# Altium PCB Strommessplatine.PcbDoc (part 2 of 2)
Units mm, origin at the board's own origin, x right, y up, seen from the top; angles counter-clockwise.
Board outline 160 x 100 mm, 4 copper layers (Top Layer, GND, VCC+, 2V5_OCM), stack 1.744 mm thick; 210 components, 62 nets, 482 pads, 189 vias.
Unrouted connection lines stored in the file: 1.
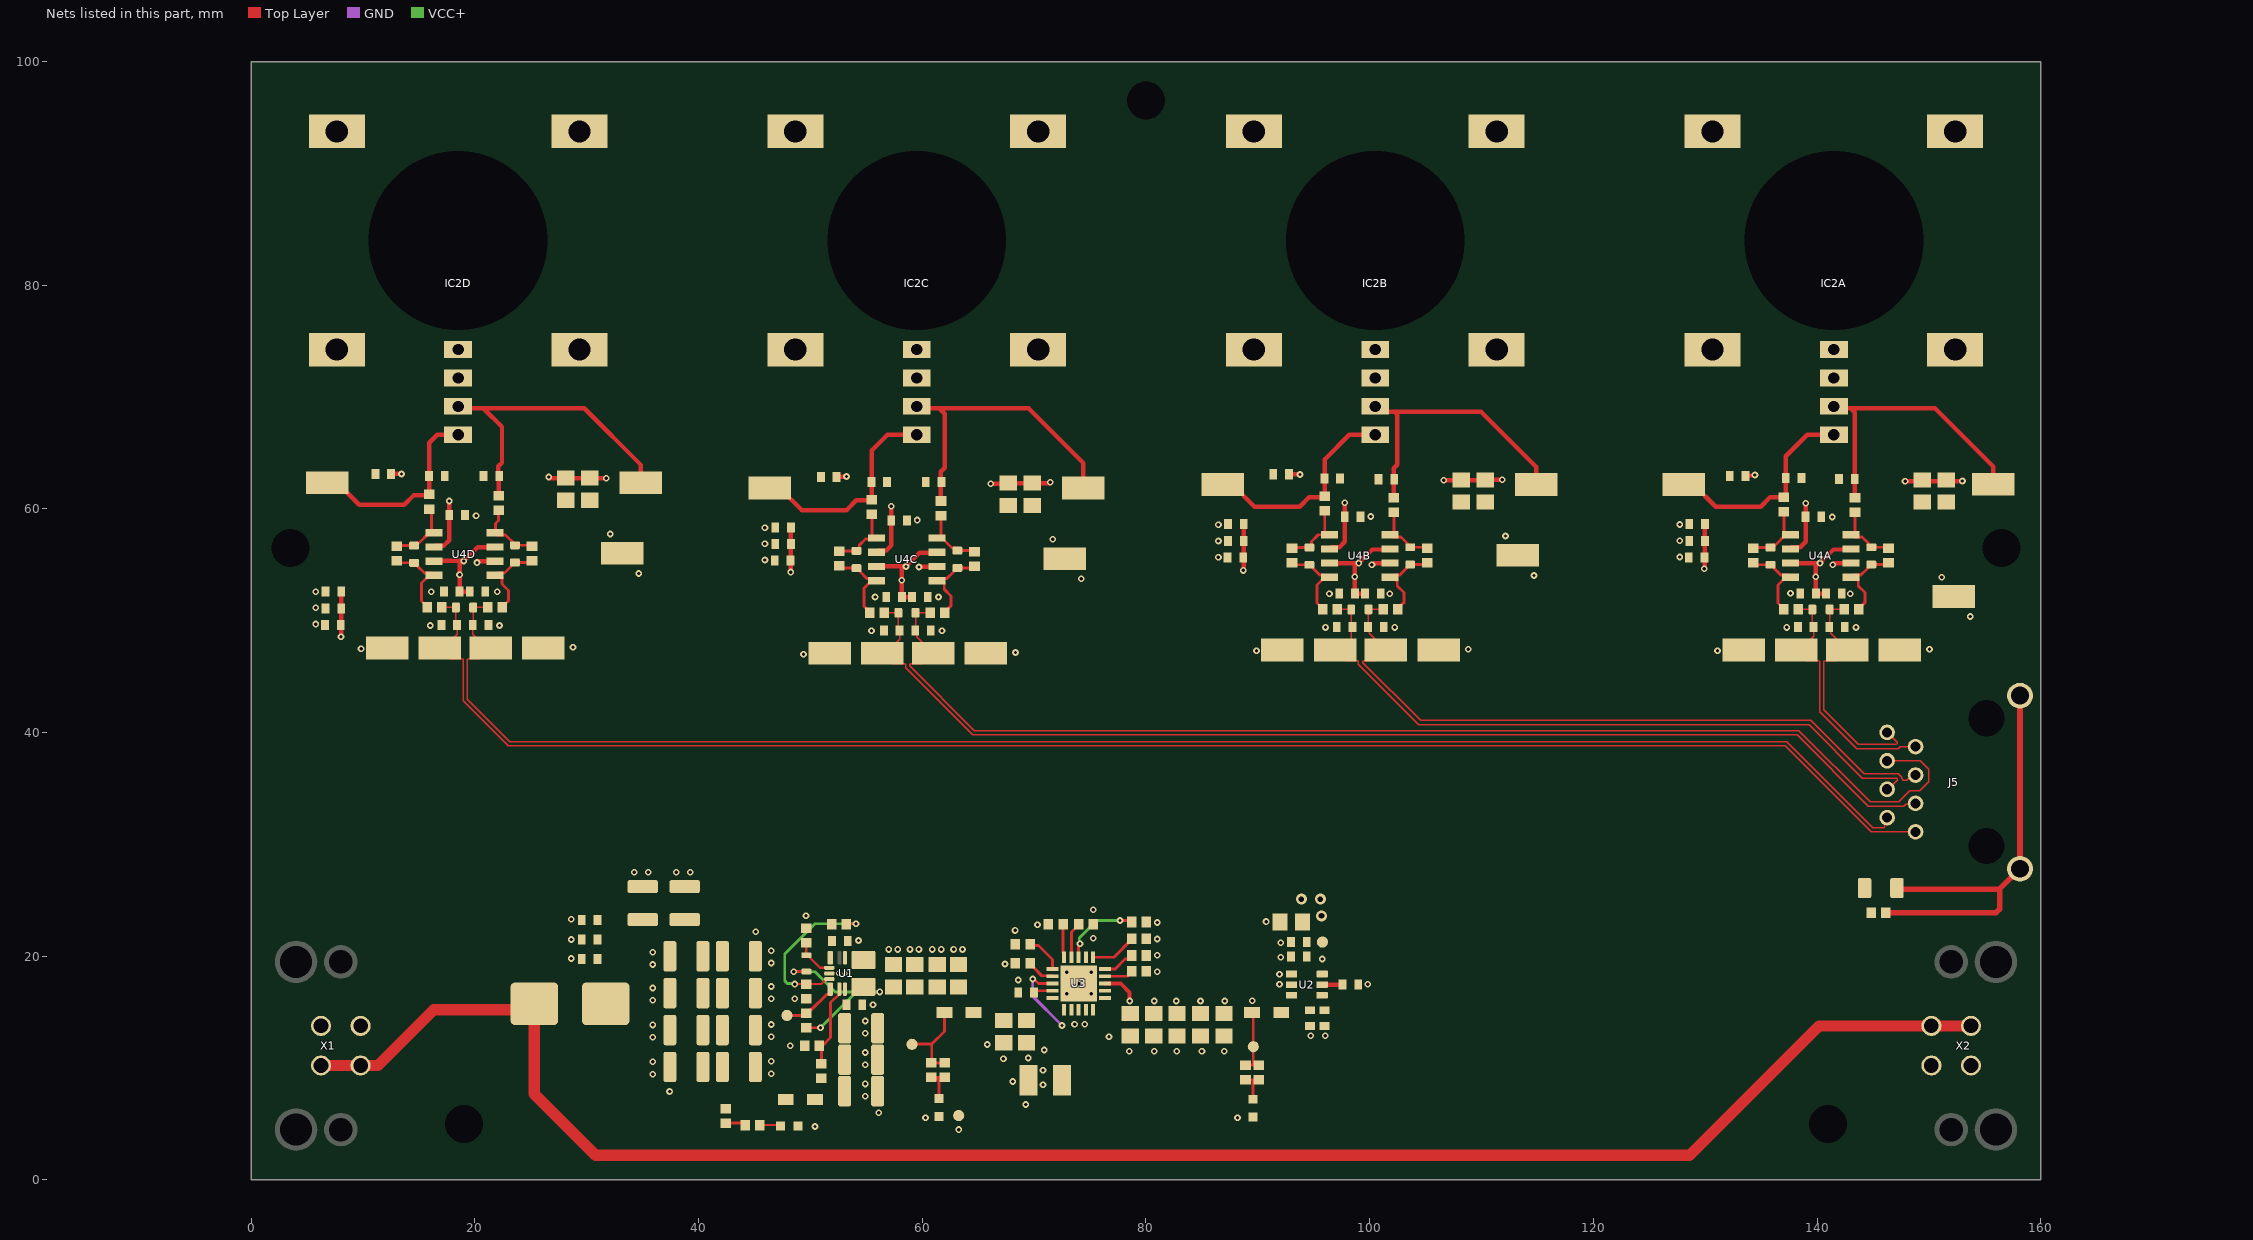
[diagram p4: the nets of this part, all layers, seen from the top]

## Part data (continued)
U1: library part TPSM365R6FRDNR, "3-V to 65-V input, 1-V to 13-V output, 0.6-A synchronous buck converter power module", Device Package=QFN-FCMOD, LCSC Part Number=C6723000, Manufacturer="Texas Instruments", Operating Temperature="-40 to +125 °C", Component Type="Power module with inductor", ComponentLink1Description=Datasheet, ComponentLink1URL=https://www.ti.com/lit/ds/symlink/tpsm365r3.pdf?ts=1747982141267, Created from=KIlhan, Created On="16/06/2025 17:12:20", Last Updated="16/06/2025 17:12:20", Live Cycle Status=1, Manufacturer Part Number=TPSM365R6FRDNR, Mounting Type=SMD, PartID=42, Series=TPSM365, Stock number="not stored", Supplier 1=LCSC, Supplier 2=Mouser, Supplier Part Number 1=C6723000, Supplier Part Number 2=595-TPSM365R6FRDNR, Type="Power module (integrated inductor)"
U2: "2.5V ±0.05% 2.75V~6V 10mA Fixed SOT-23-6 Voltage Reference ROHS", Device Package=SMD, LCSC Part Number=C6265005, Manufacturer="Texas Instruments", Operating Temperature=-40℃~+125℃, Supplier Part Number 1=595-REF35250QDBVR, Component Type="Voltage Reference", ComponentLink1Description=Datasheet, ComponentLink1URL=https://wmsc.lcsc.com/wmsc/upload/file/pdf/v2/lcsc/2311301509_Texas-Instruments-REF35250QDBVR_C6265005.pdf, Created from=KIlhan, Created On="20/03/2025 09:42:36", Last Updated="23/03/2025 21:09:34", Live Cycle Status=1, Manufacturer Part Number=REF35250QDBVR, Mounting Type=SMD, PartID=18, Stock number="not stored", Supplier 1=Mouser, Supplier 2=LCSC, Supplier Part Number 2=C6265005, Type="Voltage Reference"
U3: library part TPS7A4700RGWR, "1-A, 36-V, low-noise, high-PSRR, low-dropout voltage regulator with enable", Device Package=VQFN-20-EP(5x5), LCSC Part Number=C114839, Manufacturer="Texas Instruments", Mouser Part Number=595-TPS7A4701RGWR, Operating Temperature="-40 to +125 °C", Supplier Part Number 1=595-TPS7A4700RGWR, Arrow Part Number=TPS7A4701RGWR, Arrow Price/Stock=https://www.arrow.com/en/products/tps7a4701rgwr/texas-instruments?utm_currency=USD&region=nac, Component Type=LDO, ComponentLink1Description=Datasheet, ComponentLink1URL=https://www.ti.com/lit/ds/symlink/tps7a47.pdf?ts=1750053970117&ref_url=https%253A%252F%252Fwww.ti.com%252Fproduct%252FTPS7A47%253FkeyMatch%253DTPS7A4701RGWR%2526tisearch%253Duniversal_search%2526usecase%253DOPN-ALT, Created from=KIlhan, Created On="16/06/2025 23:37:46", Datasheet Link=http://www.ti.com/lit/gpn/tps7a47, Geometry.Height=1mm, Last Updated="18/06/2025 15:16:15", Live Cycle Status=1, Manufacturer Part Number=TPS7A4700RGWR, Manufacturer_Name="Texas Instruments", Manufacturer_Part_Number=TPS7A4701RGWR, Mounting Type=SMD, Mouser Price/Stock=https://www.mouser.co.uk/ProductDetail/Texas-Instruments/TPS7A4701RGWR?qs=2YfbMANv382WBl7zEiZ0Og%3D%3D, PartID=20, Series=TPS7A47, Stock number="not stored", Supplier 1=Mouser, Supplier 2=LCSC, Supplier Part Number 2=C114839, Type=LDO
U4A U4B U4C U4D: library part THS4521IDR, "THS452x Very Low Power, Negative Rail Input, Rail-To-Rail Output, Fully Differential Amplifier", Device Package=SOIC-8, LCSC Part Number=C16092, Manufacturer="Texas Instruments", Operating Temperature="-40 to +85 °C", Channels=1, Component Type="Differential Amplifier", ComponentLink1Description=Datasheet, ComponentLink1URL=https://www.ti.com/cn/lit/ds/symlink/ths4521.pdf?ts=1662191143470, Created from=AGeiger, Created On="03/09/2022 09:19:34", GBP="145 MHz", Last Updated="30/09/2024 15:54:43", Live Cycle Status=1, Manufacturer Part Number=THS4521IDR, Mounting Type=SMD, PartID=15, Series=THS4521, Supplier 1=LCSC, Supplier Part Number 1=C16092, Type="Differential Amplifiers"
VOUTA VOUTB VOUTC VOUTD: "Circuit Board Hardware - PCB SM TEST POINT ON T&R - MINIATURE", Device Package=SMD, LCSC Part Number=C5199800, Manufacturer="Keystone Electronics", Supplier Part Number 1=534-5019, Component Type="Circuit Board Hardware", ComponentLink1Description=Datasheet, ComponentLink1URL=https://www.mouser.de/datasheet/2/215/019-743690.pdf, ComponentLink2Description=Datasheet, ComponentLink2URL=http://www.keyelco.com/product-pdf.cfm?p=1357, Created from=AGeiger, Created On="03/06/2023 11:34:10", Last Updated="03/06/2023 11:43:17", Live Cycle Status=1, Manufacturer Part Number=5019, Mounting Type=SMD, PartID=27, Supplier 1=Mouser, Type="PCB SMD Testpoint"
X1 X2: "M12 Metric Circular Connector, A-Coded, Metal Non-shielded, 4A, 04 pins, Male Connector, Male Contact, Hexagonal, M12*1.0, Screw Thread, PCB 90°", Device Package=THT, LCSC Part Number=C19108992, Manufacturer=CAZN, Operating Temperature="-25℃ - 80 ℃", Component Type="M12 A-Type 4 Pole Connector", ComponentLink1Description=Datasheet, ComponentLink1URL=https://www.lcsc.com/datasheet/C19108992.pdf?spm=wm.sxq.inf.ggs___wm.fly.bg.0.xh&lcsc_vid=TwNaAlRSR1ldAVwCFFVbXlUCQQUIVQcDFgRYX1YFEwcxVlNeR1VZUFBQQ1RbXzsOAxUeFF5JWBYZEEoKFBINSQcJGk4eFQsCAgIaSgADAwAHC0slRVNfUVBSTlZADxALGw%3D%3D, Created from=TGaupp, Created On="03/06/2026 11:54:12", Last Updated="03/06/2026 13:55:49", Live Cycle Status=1, Manufacturer Part Number=CAZN_M12-P4A-GPL_M12, Mounting Type=THT, PartID=31, Stock number="not stored", Supplier 1=LCSC, Supplier Part Number 1=C19108992, Type="M12 Connector"

## Via types
v1: diameter 0.6, hole 0.3, Top Layer to 2V5_OCM, 104 vias
v2: diameter 0.6, hole 0.3, Top Layer to 2V5_OCM, tented both sides, 80 vias
v3: diameter 1, hole 0.5, Top Layer to 2V5_OCM, tented both sides, 3 vias
v4: diameter 0.45, hole 0.3, Top Layer to 2V5_OCM, 2 vias

## Nets (pads, with @x,y where several pads share a name; then routed paths per layer and width w, separated by ;. In a path a pad name is that pad's centre, name@x,y a point inside that pad or via, vN(x,y) a via of type N, cw(c..) or ccw(c..) an arc to the next point about the centre after c; other vN are vias at no path point)
2V5_OCM: 2V5.1 C11.2 C17A.1 C17B.1 C17C.1 C17D.1 C31.2 C32.2 U2.6 U4A.2 U4B.2 U4C.2 U4D.2 | length 20.4
  Top Layer w0.4: U4D.2@16.347,56.599 16.472,56.724 17.224,56.724 17.709,57.209 C17D.1@17.709,59.459 ; C17D.1@17.7,59.45 v2(17.7,60.7) ; U4C.2@55.872,56.124 55.997,56.249 56.749,56.249 57.234,56.734 C17C.1@57.234,58.984 ; C17C.1@57.225,58.975 v2(57.225,60.225) ; U4B.2@96.422,56.449 96.547,56.574 97.299,56.574 97.784,57.059 C17B.1@97.784,59.309 ; C17B.1@97.775,59.3 v2(97.775,60.55) ; U4A.2@137.622,56.449 137.747,56.574 138.499,56.574 138.984,57.059 C17A.1@138.984,59.309 ; C17A.1@138.975,59.3 138.987,59.313 138.987,60.488 v2(139,60.5)
  other v2: 95.75,19.75
  other v3: 95.694,23.611 93.894,25.111 95.594,25.111
+6.5V: +6.5V.1 C6.2 C7.2 C39.2 C40.2 L13.1 R5.2 R10.1 R17.1 R38.2 U1.4 | length 23.3
  Top Layer w0.254: v1(48.494,18.611) 48.506,18.622 49.618,18.622 R5.2@49.629,18.634 ; R38.2@49.629,13.614 49.632,13.611 v1(50.894,13.611) ; +6.5V.1@59.075,12.125 59.09,12.14 60.84,12.14 ; R17.1@60.794,10.461 R17.1@60.84,10.461 ; L13.1@61.979,14.964 61.979,13.279 60.84,12.14 ; R10.1@61.994,10.461 R17.1@60.84,10.461 ; R17.1@60.84,10.461 60.84,12.14
  VCC+ w0.254: v1(48.494,18.611) 50.416,18.611 52.216,16.811 54.094,16.811 ; v1(50.894,13.611) 54.094,16.811 ; v1(56.194,16.811) 54.094,16.811
GND: C1.2 C2.2 C3.2 C4.2 C5.1 C6.1 C7.1 C8.1 C9.1 C10.1 C11.1 C12.1 C13.1 C14.2 C15.1 C16A.1 C16B.1 C16C.1 C16D.1 C17A.2 C17B.2 C17C.2 C17D.2 C19.1 C20A.2 C20B.2 C20C.2 C20D.2 C22A.1 C22B.1 C22C.1 C22D.1 C23A.1 C23B.1 C23C.1 C23D.1 C24A.1 C24B.1 C24C.1 C24D.1 C25A.1 C25B.1 C25C.1 C25D.1 C26.1 C28A.1 C28B.1 C28C.1 C28D.1 C29A.1 C29B.1 C29C.1 C29D.1 C30.2 C31.1 C32.1 C33.1 C34.2 C35.1 C36.1 C37A.1 C37B.1 C37C.1 C37D.1 C38A.1 C38B.1 C38C.1 C38D.1 C39.1 C40.1 C41.2 C42.2 C43.2 C44A.1 C44B.1 C44C.1 C44D.1 C45.2 C46.2 C47.2 C48.2 C49.2 C50.2 C51.2 C52.2 C53A.1 C53B.1 C53C.1 C53D.1 C54.2 D2.1 D3.1 D4.1 GND.1 IC2A.3 IC2A.E1 IC2A.E2 IC2A.E3 IC2A.E4 IC2B.3 IC2B.E1 IC2B.E2 IC2B.E3 IC2B.E4 IC2C.3 IC2C.E1 IC2C.E2 IC2C.E3 IC2C.E4 IC2D.3 IC2D.E1 IC2D.E2 IC2D.E3 IC2D.E4 R2.2 R4.1 R6.2 R19.2 R30.2 R31.1 R32.1 R33.1 R34.1 R35.2 R36.1 R37.1 TP1A.1 TP1B.1 TP1C.1 TP1D.1 TP2A.1 TP2B.1 TP2C.1 TP2D.1 TP3A.1 TP3B.1 TP3C.1 TP3D.1 U1.10 U2.1 U2.2 U3.2 U3.7 U3.17 U3.18 U3.19 U3.21 U4A.6 U4B.6 U4C.6 U4D.6 X1.2 X1.3 X2.2 X2.3 | length 7
  Top Layer w0.4: v1(20.175,55.201) 20.229,55.201 20.343,55.315 U4D.6@22.016,55.315 ; v1(59.7,54.8) 59.727,54.827 61.304,54.827 U4C.6@61.331,54.854 ; v1(100.2,55) 100.254,55 100.408,55.154 U4B.6@101.829,55.154 ; v1(141.4,55) 141.454,55 141.608,55.154 U4A.6@143.058,55.154
  other v1: 63.25,4.5 50.4,4.775 60.285,5.57 88.185,5.57 56.094,6.011 54.894,7.486 37.4,7.9 54.894,8.586 35.908,9.461 46.5,9.5 54.894,10.299 35.908,10.561 46.5,10.6 67.25,10.825 54.894,11.399 78.5,11.5 80.75,11.5 82.75,11.5 85,11.5 87,11.5 48.2,12 65.794,12.111 35.908,12.761 46.5,12.8 76.694,12.811 54.894,13.111 35.908,13.861 46.5,13.9 73.616,13.911 74.516,13.911 54.894,14.211 55.585,15.67 35.908,16.061 46.5,16.2 48.594,16.211 72.912,16.633 75.112,16.633 35.908,17.161 46.5,17.3 73.991,17.556 68.585,17.87 72.912,18.583 75.112,18.583 80.994,18.611 35.908,19.261 67.394,19.311 46.5,19.4 80.994,20.078 35.908,20.361 46.5,20.5 56.994,20.611 57.794,20.611 58.894,20.611 59.694,20.611 60.894,20.611 61.694,20.611 62.794,20.611 63.594,20.611 54.294,21.411 80.994,21.544 75.294,21.611 45.1,22.2 68.294,22.311 70.294,22.811 80.994,23.011 49.594,23.611 75.285,24.17 34.25,27.5 35.5,27.5 38,27.5 39.25,27.5
  other v2: 69.25,6.75 70.794,8.511 68.075,8.8 70.794,9.811 69.475,10.9 70.895,11.611 94.737,12.9 96.037,12.9 91.937,17.5 99.837,17.5 91.937,18.4 28.6,19.8 92.037,19.9 92.037,21.2 28.6,21.5 90.737,23.1 28.6,23.3 49.377,47.011 68.325,47.16 89.875,47.311 131.104,47.311 108.823,47.46 150.052,47.46 9.817,47.486 28.765,47.635 55.45,49.1 61.756,49.104 96.054,49.404 102.254,49.404 137.283,49.404 143.483,49.404 15.996,49.579 22.196,49.579 5.775,49.7 153.7,50.375 5.775,51.15 55.775,52.125 61.45,52.125 96.4,52.425 101.8,52.425 142.971,52.411 137.635,52.456 5.775,52.6 16.1,52.6 22,52.6 74.202,53.75 151.15,53.9 114.7,54.05 34.642,54.225 45.925,55.425 86.475,55.675 127.725,55.7 45.925,56.875 86.475,57.125 127.725,57.15 71.652,57.275 112.15,57.575 32.092,57.75 45.925,58.325 86.475,58.575 127.725,58.6 59.55,59 141.35,59.275 100.1,59.325 20.1,59.4
  other v4: 52.516,18.464 53.089,18.464
I1_OUT_N: C16A.2 C18A.1 J5.A8 OUT_NA.1 R13A.2 | length 21.7
  Top Layer w0.127: C18A.1@141.124,51.011 R13A.2@142.423,51.011 ; C18A.1@141.127,51.008 141.127,49.465 C16A.2@141.087,49.425 141.212,49.299 141.212,48.859 OUT_NA.1@142.686,47.385 141.734,46.434 140.68,46.434 140.605,46.359 140.605,42.033 143.7,38.939 147.09,38.939 147.164,39.013 147.164,39.118 J5.A8@146.268,40.015
I1_OUT_P: C18A.2 C20A.1 J5.A7 OUT_PA.1 R15A.2 | length 22.4
  Top Layer w0.127: OUT_PA.1@138.144,47.385 139.095,46.434 140.15,46.434 140.224,46.359 140.224,41.876 143.542,38.558 147.248,38.558 147.435,38.745 J5.A7@148.808,38.745 ; R15A.2@138.351,51.011 C18A.2@139.584,51.011 139.584,49.528 C20A.1@139.687,49.425 139.687,48.623 OUT_PA.1@138.449,47.385
I2_OUT_N: C16B.2 C18B.1 J5.A5 OUT_NB.1 R13B.2 | length 62.2
  Top Layer w0.127: C16B.2@99.858,49.425 99.984,49.299 99.984,48.859 OUT_NB.1@101.457,47.385 100.506,46.434 99.451,46.434 99.377,46.359 99.377,46.254 104.55,41.081 139.458,41.081 144.223,36.316 147.279,36.316 147.577,36.018 147.577,35.904 147.726,35.755 148.013,35.755 148.463,36.205 J5.A5@148.808,36.205 ; C16B.2@99.895,49.462 C18B.1@99.895,51.011 R13B.2@101.194,51.011
I2_OUT_P: C18B.2 C20B.1 J5.A4 OUT_PB.1 R15B.2 | length 62
  Top Layer w0.127: OUT_PB.1@96.915,47.385 97.867,46.434 98.921,46.434 98.996,46.359 98.996,46.096 104.392,40.7 139.3,40.7 144.065,35.935 147.121,35.935 147.196,35.861 147.196,35.755 146.375,34.935 J5.A4@146.268,34.935 ; R15B.2@97.122,51.011 C18B.2@98.355,51.011 98.355,48.52 98.351,48.516 98.351,48.337 97.4,47.385 OUT_PB.1@97.22,47.385
I3_OUT_N: C16C.2 C18C.1 J5.A6 OUT_NC.1 R13C.2 | length 110.2
  Top Layer w0.127: C16C.2@59.36,49.125 59.486,48.999 59.486,48.559 OUT_NC.1@60.959,47.085 60.008,46.134 58.953,46.134 58.879,46.059 58.879,45.954 64.652,40.181 138.377,40.181 144.758,33.8 147.3,33.8 148.303,34.803 149.203,34.803 150,35.6 150,36.7 149.225,37.475 J5.A6@146.268,37.475 ; C16C.2@59.397,49.162 C18C.1@59.397,50.711 R13C.2@60.696,50.711
I3_OUT_P: C18C.2 C20C.1 J5.A3 OUT_PC.1 R15C.2 | length 103.7
  Top Layer w0.127: OUT_PC.1@56.417,47.085 57.369,46.134 58.423,46.134 58.498,46.059 58.498,45.796 64.494,39.8 138.219,39.8 144.6,33.419 147.759,33.419 147.917,33.577 148.72,33.577 J5.A3@148.808,33.665 ; R15C.2@56.624,50.711 C18C.2@57.857,50.711 57.857,49.228 C20C.1@57.96,49.125 57.96,48.323 OUT_PC.1@56.722,47.085
I4_OUT_N: C16D.2 C18D.1 J5.A2 OUT_ND.1 R13D.2 | length 144.3
  Top Layer w0.127: R13D.2@21.15,51.2 21.136,51.186 C18D.1@19.837,51.186 19.837,49.637 C16D.2@19.8,49.6 19.8,48.798 21.038,47.56 OUT_ND.1@21.399,47.56 20.448,46.609 19.393,46.609 19.319,46.534 19.319,44.995 19.319,43 23.119,39.2 137.3,39.2 144.994,31.506 146.002,31.506 146.077,31.58 146.077,32.204 J5.A2@146.268,32.395
I4_OUT_P: C18D.2 C20D.1 J5.A1 OUT_PD.1 R15D.2 | length 146.7
  Top Layer w0.127: R15D.2@17.05,51.2 17.064,51.186 C18D.2@18.297,51.186 18.297,49.703 C20D.1@18.4,49.6 18.4,48.798 17.162,47.56 OUT_PD.1@16.857,47.56 17.809,46.609 18.863,46.609 18.938,46.534 18.938,44.837 18.938,42.842 22.961,38.819 137.142,38.819 144.836,31.125 J5.A1@148.808,31.125
NetC1_1: C1.1 R3.2 U1.8
NetC2_1: C2.1 C3.1 C4.1 C5.2 L1.2 R1.2 U1.3
NetC12_2: C12.2 U2.5 | length 1.9
  Top Layer w0.4: U2.5@95.689,17.464 C12.2@97.579,17.464
NetC13_2: C13.2 C33.2 L3.2 U2.3 U2.4
NetC21A_2: C21A.2 R11A.1 R12A.2 U4A.8 | length 5.9
  Top Layer w0.254: U4A.8@143.058,57.694 U4A.8@143.198,57.694 ; R12A.2@143.396,59.706 143.396,57.892 U4A.8@143.198,57.694 ; C21A.2@144.862,56.57 R11A.1@146.292,56.57 ; C21A.2@144.889,56.627 144.719,56.627 144.549,56.798 144.549,56.968 144.02,57.496 143.396,57.496 U4A.8@143.198,57.694
NetC21B_2: C21B.2 R11B.1 R12B.2 U4B.8 | length 5.7
  Top Layer w0.254: U4B.8@101.829,57.694 101.969,57.694 102.167,57.892 R12B.2@102.167,59.706 ; U4B.8@102.027,57.496 102.792,57.496 C21B.2@103.66,56.628 ; C21B.2@103.633,56.57 R11B.1@105.063,56.57
NetC21C_2: C21C.2 R11C.1 R12C.2 U4C.8 | length 5.9
  Top Layer w0.254: U4C.8@61.331,57.394 U4C.8@61.424,57.394 ; R12C.2@61.669,59.406 61.669,57.639 U4C.8@61.424,57.394 ; R11C.1@64.66,56.175 64.565,56.27 C21C.2@63.135,56.27 62.907,56.498 62.665,56.498 61.768,57.394 U4C.8@61.424,57.394
NetC21D_2: C21D.2 R11D.1 R12D.2 U4D.8 | length 6.1
  Top Layer w0.254: R12D.2@22.109,59.881 22.109,58.965 21.829,58.686 21.829,57.928 U4D.8@21.771,57.869 21.969,57.671 22.734,57.671 C21D.2@23.602,56.803 ; C21D.2@23.49,56.745 C21D.2@23.575,56.745 25.005,56.745 R11D.1@25.1,56.65
NetC27A_2: C27A.2 R14A.2 R16A.1 U4A.1 | length 5.9
  Top Layer w0.254: R16A.1@134.332,56.545 C27A.2@135.837,56.545 136.065,56.773 136.275,56.773 137.196,57.694 U4A.1@137.239,57.694 ; R14A.2@137.041,59.75 137.041,57.892 U4A.1@137.239,57.694 ; U4A.1@137.634,57.694 U4A.1@137.239,57.694
NetC27B_2: C27B.2 R14B.2 R16B.1 U4B.1 | length 6.2
  Top Layer w0.254: R16B.1@93.103,56.545 C27B.2@94.608,56.545 94.811,56.748 94.811,57.099 95.407,57.694 U4B.1@96.182,57.694 ; R14B.2@95.984,59.815 95.984,57.892 U4B.1@96.182,57.694 ; U4B.1@96.405,57.694 U4B.1@96.182,57.694
NetC27C_2: C27C.2 R14C.2 R16C.1 U4C.1 | length 6.2
  Top Layer w0.254: R16C.1@52.605,56.245 54.128,56.245 54.356,56.473 54.356,56.756 54.912,57.312 55.649,57.312 U4C.1@55.731,57.394 ; R14C.2@55.486,59.515 55.486,57.639 U4C.1@55.731,57.394 ; U4C.1@55.907,57.394 U4C.1@55.731,57.394
NetC27D_2: C27D.2 R14D.2 R16D.1 U4D.1 | length 6
  Top Layer w0.254: R16D.1@13,56.675 13.045,56.72 C27D.2@14.55,56.72 14.778,56.948 14.988,56.948 15.909,57.869 U4D.1@16.124,57.869 ; R14D.2@15.926,59.99 16.124,59.792 U4D.1@16.124,57.869 ; U4D.1@16.347,57.869 U4D.1@16.124,57.869
NetC30_1: C30.1 U3.14 | length 1.7
  Top Layer w0.254: C30.1@69.979,16.764 70.129,16.914 U3.14@71.629,16.914
NetC54_1: C54.1 J5.S1 J5.S2 R19.1 | length 39.3
  Top Layer w0.5: R19.1@146.15,23.9 156,23.9 156.325,24.225 156.325,26 ; C54.1@147.15,26 156.325,26 ; J5.S2@158.15,43.3 J5.S1@158.15,27.825 156.325,26
NetD2_2: D2.2 R18.2 | length 1.9
  Top Layer w0.16: R18.2@45.45,4.9 47.125,4.9 D2.2@47.3,4.725
NetD3_2: D3.2 R8.2 R9.2 | length 2.9
  Top Layer w0.254: R9.2@88.894,8.961 R8.2@90.094,8.961 ; D3.2@89.564,7.211 89.564,8.936
NetD4_2: D4.2 R10.2 R17.2 | length 3.4
  Top Layer w0.254: R17.2@60.794,9.161 R10.2@61.994,9.161 ; 61.332,8.989 61.489,8.831 ; 61.394,9.161 61.394,8.926 61.489,8.831 ; D4.2@61.489,7.264 61.489,8.831
NetR1_1: R1.1 R2.1 U1.2 | length 7.2
  Top Layer w0.254: R1.1@51.029,10.514 50.979,10.564 50.979,11.864 50.979,11.914 51.794,12.729 51.794,15.854 52.579,16.639 U1.2@52.579,17.064
NetR3_1: R3.1 R4.2 U1.11 | length 15.1
  Top Layer w0.2: v1(48.594,17.511) 49.626,17.511 R4.2@49.629,17.514 50.95,17.514 51.4,17.964 U1.11@51.679,17.964
  Top Layer w0.254: R3.1@53.179,22.864 53.226,22.911 v1(54.074,22.911)
  VCC+ w0.254: v1(48.594,17.511) 48.528,17.577 47.928,17.577 47.694,17.811 47.694,20.211 50.394,22.911 v1(54.074,22.911)
NetR5_1: R5.1 R6.1 U1.9 | length 3.7
  Top Layer w0.2: R6.1@49.629,21.214 R5.1@49.629,20.094 49.829,20.094 49.952,19.971 49.952,19.86 50.848,18.964 U1.9@51.679,18.964
NetR7_2: R7.2 R18.1 | length 1.9
  Top Layer w0.254: R7.2@42.425,5.075 43.877,5.075 44.175,4.777 R18.1@44.175,4.75
NetR30_1: R30.1 U3.12 | length 2.7
  Top Layer w0.254: R30.1@69.4,19.443 69.5,19.443 69.927,19.016 69.927,19.013 70.678,18.262 71.581,18.262 U3.12@71.629,18.214
NetR31_2: R31.2 U3.11 | length 3.4
  Top Layer w0.254: R31.2@69.629,21.064 69.724,20.969 70.374,20.969 71.629,19.714 U3.11@71.629,18.864
NetR32_2: R32.2 U3.10 | length 3
  Top Layer w0.254: R32.2@72.579,22.864 72.579,20.363 72.679,20.264 U3.10@72.679,19.914
NetR33_2: R33.2 U3.9 | length 3.2
  Top Layer w0.254: U3.9@73.329,19.914 73.329,22.164 73.979,22.814 R33.2@73.979,22.864
NetR34_2: R34.2 U3.8 | length 7.2
  Top Layer w0.254: U3.8@73.979,19.914 73.979,20.902 74.094,21.017 v1(74.094,21.111) ; v1(77.679,23.195) 78.598,23.195 R34.2@78.729,23.064
  VCC+ w0.254: v1(74.094,21.111) 74.033,21.172 74.033,21.628 75.6,23.195 v1(77.679,23.195)
NetR35_1: R35.1 U3.6 | length 4.2
  Top Layer w0.254: U3.6@75.279,19.914 77.129,19.914 78.729,21.514 R35.1@78.729,21.564
NetR36_2: R36.2 U3.5 | length 2.9
  Top Layer w0.254: U3.5@76.329,18.864 77.247,18.864 78.123,19.74 78.431,19.74 78.729,20.038 R36.2@78.729,20.064
NetR37_2: R37.2 U3.4 | length 2.6
  Top Layer w0.254: U3.4@76.329,18.214 78.329,18.214 78.729,18.614 R37.2@78.729,18.664
NetU1_5: U1.5 U1.6
OP_OUTA_N: C21A.1 R11A.2 R13A.1 U4A.5 | length 6.1
  Top Layer w0.254: U4A.5@143.256,54.082 143.914,54.082 C21A.1@144.549,54.717 ; U4A.5@143.693,53.686 143.693,53.118 144.287,52.525 144.287,51.603 144.265,51.603 R13A.1@143.737,51.075 ; C21A.1@144.777,55.03 R11A.2@146.242,55.03
OP_OUTA_P: C27A.1 R15A.1 R16A.2 U4A.4 | length 6.3
  Top Layer w0.254: R16A.2@134.482,55.005 C27A.1@135.922,55.005 ; C27A.1@136.15,54.692 136.759,54.082 U4A.4@137.436,54.082 ; R15A.1@137.037,51.075 136.512,51.6 136.512,53.2 U4A.4@137.196,53.884
OP_OUTB_N: C21B.1 R11B.2 R13B.1 U4B.5 | length 7.2
  Top Layer w0.254: U4B.5@101.829,53.884 102.1,53.884 U4B.5@102.108,53.892 ; R13B.1@102.508,51.075 103.036,51.603 103.058,51.603 103.058,52.525 102.464,53.119 102.464,53.535 U4B.5@102.108,53.892 ; R11B.2@105.013,55.03 103.548,55.03 103.32,54.802 103.32,54.717 102.685,54.082 102.298,54.082 U4B.5@102.108,53.892
OP_OUTB_P: C27B.1 R15B.1 R16B.2 U4B.4 | length 7
  Top Layer w0.254: R16B.2@93.253,55.005 94.693,55.005 94.921,54.777 94.921,54.692 95.531,54.082 95.769,54.082 U4B.4@95.967,53.884 ; R15B.1@95.808,51.075 95.283,51.6 95.283,53.2 U4B.4@95.967,53.884 ; U4B.4@96.405,53.884 U4B.4@95.967,53.884
OP_OUTC_N: C21C.1 R11C.2 R13C.1 U4C.5 | length 7
  Top Layer w0.254: U4C.5@61.331,53.584 61.768,53.584 61.879,53.474 61.879,53.695 61.966,53.782 62.187,53.782 62.822,54.417 62.822,54.502 63.05,54.73 R11C.2@64.515,54.73 ; U4C.5@61.966,53.386 61.966,52.819 62.56,52.225 62.56,51.303 62.538,51.303 R13C.1@62.01,50.775
OP_OUTC_P: C27C.1 R15C.1 R16C.2 U4C.4 | length 6.3
  Top Layer w0.254: R16C.2@52.755,54.705 C27C.1@54.195,54.705 ; C27C.1@54.423,54.392 55.033,53.782 U4C.4@55.709,53.782 ; R15C.1@55.31,50.775 54.785,51.3 54.785,52.9 U4C.4@55.469,53.584
OP_OUTD_N: C21D.1 R11D.2 R13D.1 U4D.5 | length 7.8
  Top Layer w0.254: R13D.1@22.45,51.2 22.45,51.25 22.978,51.778 23,51.778 23,52.7 22.406,53.294 22.406,53.861 22.208,54.059 U4D.5@21.771,54.059 21.969,54.257 22.627,54.257 23.262,54.892 23.262,54.977 23.49,55.205 24.955,55.205 R11D.2@25.1,55.35
OP_OUTD_P: C27D.1 R15D.1 R16D.2 U4D.4 | length 7.7
  Top Layer w0.254: R16D.2@13,55.375 13.195,55.18 14.635,55.18 14.863,54.952 14.863,54.867 15.473,54.257 16.149,54.257 U4D.4@16.347,54.059 15.909,54.059 15.225,53.375 15.225,51.775 15.75,51.25 R15D.1@15.75,51.2
PGOOD: PGOOD.1 R38.1 U1.1 | length 5.1
  Top Layer w0.254: PGOOD.1@47.894,14.711 49.426,14.711 49.927,15.212 50.068,15.212 51.447,16.591 51.657,16.591 51.767,16.701 U1.1@51.767,17.064
V_RefA: C44A.2 IC2A.1 R14A.1 V_RefA.1 | length 18.2
  Top Layer w0.4: V_RefA.1@128.964,62.175 130.939,60.2 134.97,60.2 135.831,61.061 137.204,61.061 C44A.2@137.204,62.725 ; C44A.2@137.204,62.725 137.204,64.704 137.738,65.238 139.13,66.63 IC2A.1@141.5,66.63
V_RefB: C44B.2 IC2B.1 R14B.1 V_RefB.1 | length 19.1
  Top Layer w0.4: V_RefB.1@86.85,62.175 87.735,62.175 89.71,60.2 93.741,60.2 94.602,61.061 95.975,61.061 95.975,62.725 95.975,64.425 98.18,66.63 IC2B.1@100.5,66.63
V_RefC: C44C.2 IC2C.1 R14C.1 V_RefC.1 | length 18.5
  Top Layer w0.4: V_RefC.1@47.237,61.875 49.212,59.9 53.243,59.9 54.104,60.761 55.477,60.761 55.477,62.425 55.477,65.227 56.88,66.63 IC2C.1@59.5,66.63
V_RefD: C44D.2 IC2D.1 R14D.1 V_RefD.1 | length 17
  Top Layer w0.4: V_RefD.1@7.677,62.35 9.652,60.375 13.683,60.375 14.544,61.236 15.917,61.236 15.917,62.9 15.917,65.917 16.63,66.63 IC2D.1@18.5,66.63
VCC+: C8.2 C9.2 C10.2 C23A.2 C23B.2 C23C.2 C23D.2 C24A.2 C24B.2 C24C.2 C24D.2 C25A.2 C25B.2 C25C.2 C25D.2 C28A.2 C28B.2 C28C.2 C28D.2 C29A.2 C29B.2 C29C.2 C29D.2 C35.2 C36.2 C37A.2 C37B.2 C37C.2 C37D.2 C38A.2 C38B.2 C38C.2 C38D.2 C53A.2 C53B.2 C53C.2 C53D.2 IC2A.4 IC2B.4 IC2C.4 IC2D.4 L3.1 R8.1 R9.1 U3.1 U3.3 U3.20 U4A.3 U4A.7 U4B.3 U4B.7 U4C.3 U4C.7 U4D.3 U4D.7 VCC+.1 | length 90.3
  Top Layer w0.254: R9.1@88.894,10.261 88.909,10.276 89.594,10.276 VCC+.1@89.594,11.911 89.594,14.849 L3.1@89.479,14.964 ; 89.579,10.261 R8.1@90.094,10.261
  Top Layer w0.35: U3.3@76.329,17.564 77.741,17.564 78.537,16.768 v1(78.537,16)
  Top Layer w0.4: v2(8.025,48.575) 8.03,48.58 8.03,52.592 C28D.2@8.035,52.597 ; C53D.2@12.492,63.125 v2(13.425,63.125) ; U4D.3@16.356,55.329 16.384,55.358 18.642,55.358 ; C24D.2@19.661,52.618 19.651,52.608 18.745,52.608 18.641,52.711 18.641,54.128 18.663,54.15 18.642,54.171 18.642,55.358 ; U4D.7@22.105,56.549 22.08,56.574 20.23,56.574 19.014,55.358 18.642,55.358 ; U4D.7@22.184,56.599 U4D.7@22.209,56.574 ; v1(26.6,62.85) 26.654,62.85 26.754,62.75 v1(31.75,62.75) ; v2(48.225,54.35) 48.235,54.36 48.235,58.337 C28C.2@48.245,58.347 ; C53C.2@52.325,62.85 52.35,62.875 53.198,62.875 v2(53.223,62.9) ; U4C.3@55.879,54.826 U4C.3@55.907,54.854 58.165,54.854 ; C24C.2@59.183,52.114 59.173,52.104 58.267,52.104 58.164,52.207 v1(58.164,53.625) 58.186,53.647 58.165,53.668 58.165,54.854 ; U4C.7@61.628,56.046 61.603,56.071 59.753,56.071 v1(58.536,54.854) 58.165,54.854 ; U4C.7@61.707,56.096 U4C.7@61.732,56.071 ; v1(66.127,62.25) C37C.2@67.687,62.25 ; C37C.2@67.688,62.3 71.321,62.3 71.396,62.375 v1(71.45,62.375) ; v2(88.7,54.5) 88.722,54.522 88.722,58.625 C28B.2@88.743,58.647 ; C53B.2@92.775,63.1 92.788,63.088 93.762,63.088 v2(93.775,63.075) ; U4B.3@96.377,55.126 U4B.3@96.405,55.154 98.663,55.154 ; C24B.2@99.681,52.414 99.671,52.404 98.765,52.404 98.662,52.507 v1(98.662,53.925) 98.684,53.947 98.663,53.968 98.663,55.154 ; U4B.7@102.126,56.346 102.101,56.371 100.251,56.371 v1(99.034,55.154) 98.663,55.154 ; U4B.7@102.205,56.396 U4B.7@102.23,56.371 ; v1(106.625,62.55) 110.475,62.55 110.525,62.6 v1(111.85,62.6) ; v2(129.928,54.649) 129.95,54.671 129.95,58.625 C28A.2@129.972,58.647 ; C53A.2@133.6,62.95 133.638,62.988 134.409,62.988 v2(134.446,63.025) ; U4A.3@137.605,55.126 U4A.3@137.634,55.154 139.891,55.154 ; C24A.2@140.91,52.414 140.9,52.404 139.994,52.404 139.891,52.507 v1(139.891,53.925) 139.913,53.947 139.891,53.968 139.891,55.154 ; U4A.7@143.354,56.346 143.329,56.371 141.48,56.371 v1(140.263,55.154) 139.891,55.154 ; U4A.7@143.433,56.396 U4A.7@143.458,56.371 ; v2(147.875,62.475) 147.887,62.488 152.987,62.488 v2(153,62.5)
  other v1: 80.737,16 82.716,16 84.876,16 87.037,16 89.494,16.011 18.625,54.111 18.997,55.341
VIN: C14.1 C34.1 C41.1 C42.1 C43.1 C45.1 C46.1 C47.1 C48.1 C49.1 C50.1 C51.1 C52.1 F1.2 L1.1 R7.1
Vin_LDO: C15.2 C19.2 C26.2 L13.2 U3.13 U3.15 U3.16 | length 7.2
  Top Layer w0.254: v1(69.879,17.964) 69.973,17.964 70.373,17.564 U3.13@71.629,17.564
  GND w0.254: v1(69.879,17.964) 69.879,16.426 v1(72.494,13.811)
VIN_unfused: F1.1 X1.1 X1.4 X2.1 X2.4 | length 164.6
  Top Layer w1: X1.4@6.232,10.232 X1.1@9.732,10.232 ; X1.1@9.768,10.232 11.332,10.232 16.319,15.219 F1.1@24.779,15.219 ; F1.1@25.31,15.75 F1.1@24.779,15.219 ; X2.4@153.768,13.768 X2.1@150.232,13.768 140.168,13.768 128.6,2.2 30.8,2.2 25.295,7.705 25.295,14.704 F1.1@24.779,15.219
VOUTA: C22A.2 IC2A.2 R12A.1 VOUTA.1 | length 26.2
  Top Layer w0.4: IC2A.2@141.5,69.17 141.67,69 143,69 ; C22A.2@143.379,62.675 143.379,68.621 143,69 ; R12A.1@143.391,61.073 C22A.2@143.391,62.662 ; VOUTA.1@155.775,62.2 155.775,63.775 150.55,69 143,69
VOUTB: C22B.2 IC2B.2 R12B.1 VOUTB.1 | length 26.1
  Top Layer w0.4: IC2B.2@100.5,69.17 100.983,68.687 102.241,68.687 ; R12B.1@102.175,61.061 102.163,61.074 102.163,62.662 102.15,62.675 102.15,63.625 102.475,63.95 102.475,68.453 102.241,68.687 ; VOUTB.1@114.9,62.175 114.9,63.75 109.963,68.687 102.241,68.687
VOUTC: C22C.2 IC2C.2 R12C.1 VOUTC.1 | length 27.8
  Top Layer w0.4: IC2C.2@59.5,69.17 59.67,69 61.5,69 ; C22C.2@61.652,62.375 61.652,63.325 62,63.673 62,68.5 61.5,69 ; R12C.1@61.665,60.774 C22C.2@61.665,62.362 ; VOUTC.1@74.402,61.875 74.402,64.098 69.5,69 61.5,69
VOUTD: C22D.2 IC2D.2 R12D.1 VOUTD.1 | length 28.7
  Top Layer w0.4: IC2D.2@18.5,69.17 18.67,69 20.75,69 ; C22D.2@22.092,62.85 22.092,63.8 22.417,64.125 22.417,67.333 20.75,69 ; R12D.1@22.105,61.249 C22D.2@22.105,62.837 ; VOUTD.1@34.842,62.35 34.842,63.925 29.767,69 20.75,69
pads on no net: IC2A.MH1 IC2B.MH1 IC2C.MH1 IC2D.MH1 J5.MH3 J5.MH4 MH1.1 MH2.1 MH4.1 MH5.1 MH6.1 U1.7 X1.MH1 X1.MH2 X1.MH3 X1.MH4 X2.MH1 X2.MH2 X2.MH3 X2.MH4

## Polygon pours and split planes (outlines as drawn)
GND on Top Layer "t" (solid, remove dead copper, pour order 169): -0.061,0 -0.061,100 160.117,100 160.117,0
NetC2_1 on Top Layer "NETC2_1_L01_P154" (solid, pour order 154): 49.5,5.825 53.977,5.825 53.977,15.075 53.977,16.175 53.477,16.175 53.477,17.775 52.777,17.775 52.777,16.175 52.277,16.175 52.277,9.875 52.077,9.675 49.5,9.675
VIN on Top Layer "Top Layer-VIN" (solid, pour order 158): 39.377,7.873 41.325,5.925 48.65,5.925 48.65,8.1 44.05,8.1 43,9.15 43,24.25 30.25,24.25 30.25,19 29.25,18 29.25,13 33.9,13 34.6,13.7 34.6,20.2 36.4,22 39.377,22
Vin_LDO on Top Layer "VIN_LDO_L01_P143" (solid, remove dead copper, pour order 143): 72.977,14.175 73.377,14.175 73.377,7.375 71.577,7.375 71.577,13.275 63.577,13.275 63.577,15.894 70.933,15.894 70.933,16.475 72.277,16.475 72.277,15.786 72.977,15.786
VCC+ on Top Layer "VCC+_L01_P147" (solid, pour order 147): 75.777,16.575 75.777,15.866 75.729,15.818 75.077,15.818 75.077,14.588 75.933,13.975 90.577,13.975 90.577,16.575
NetU1_5 on Top Layer "NETU1_5_L01_P156" (solid, pour order 156): 52.812,20.575 52.812,18.875 55.742,18.875 55.812,18.975 55.812,20.575
+6.5V on Top Layer "+6.5V_L01_P155" (solid, pour order 155): 53.502,18.117 53.502,16.625 53.652,16.475 61.102,16.475 61.102,14.275 61.002,14.175 62.877,14.175 62.877,16.475 64.377,16.475 64.377,18.117
2V5_OCM on Top Layer "2V5_OCM_L01_P144" (solid, pour order 144): 93.079,25.788 93.079,22.021 93.737,22.021 93.923,21.835 93.923,17.897 96.577,17.897 96.577,17.929 96.577,25.806
NetC13_2 on Top Layer "NETC13_2_L01_P145" (solid, pour order 145): 96.527,16.875 91.227,16.875 91.227,14.475 96.527,14.475
NetC1_1 on Top Layer "NETC1_1_L01_P142" (solid, pour order 142): 51.277,23.525 51.277,19.225 52.277,19.225 52.277,23.525
2V5_OCM on 2V5_OCM "GND_L02_P001" (solid, remove dead copper, pour order 159): -0.061,0.011 -0.061,61.511 160.317,61.511 160.317,0.011
GND on GND "GND_L01_P000" (solid, remove dead copper, pour order 92): -0.061,0.011 -0.061,100 160.117,100 160.117,0.011
VCC+ on VCC+ "GND_L01_P000" (solid, remove dead copper, pour order 166): -0.061,0.011 -0.061,100 160.117,100 160.117,0.011

## Other copper
Top Layer:
  pour cut-out: 133.316,57.4 136.341,57.4 136.341,60.4 137.741,60.4 138.091,60.4 138.091,60.25 138.091,58.5 142.441,58.5 142.441,60.4 144.266,60.4 144.266,57.5 147.291,57.5 147.291,54.3 145.341,54.3 144.341,53.3 136.341,53.3 135.341,54.3 133.316,54.3
  pour cut-out: 12.029,57.575 15.054,57.575 15.054,60.575 16.454,60.575 16.804,60.575 16.804,60.425 16.804,58.675 21.154,58.675 21.154,60.575 22.979,60.575 22.979,57.675 26.004,57.675 26.004,54.475 24.054,54.475 23.054,53.475 15.054,53.475 14.054,54.475 12.029,54.475
  pour cut-out: 51.589,57.1 54.614,57.1 54.614,60.1 56.014,60.1 56.364,60.1 56.364,59.95 56.364,58.2 60.714,58.2 60.714,60.1 62.539,60.1 62.539,57.2 65.564,57.2 65.564,54 63.614,54 62.614,53 54.614,53 53.614,54 51.589,54
  region net GND: 75.616,17.092 76.847,17.092 76.847,16.711 75.616,16.711 75.573,16.668 75.573,15.935 74.875,15.935 74.875,13.5 73.162,13.5 73.162,15.922 72.347,15.922 72.347,19.192 74.447,19.192 74.447,20.589 74.797,20.589 74.816,20.57 74.816,19.192 75.616,19.192
  pour cut-out: 92.088,57.4 95.112,57.4 95.112,60.4 96.512,60.4 96.863,60.4 96.863,60.25 96.863,58.5 101.213,58.5 101.213,60.4 103.038,60.4 103.038,57.5 106.063,57.5 106.063,54.3 104.112,54.3 103.112,53.3 95.112,53.3 94.112,54.3 92.088,54.3
GND:
  pour cut-out: 144.312,60.356 142.479,60.356 142.479,53.256 144.17,53.256 145.27,54.356 147.156,54.356 147.179,54.334 147.179,57.216 145.279,57.216 144.312,58.184
  pour cut-out: 136.341,60.465 138.084,60.465 138.084,53.3 136.341,53.3 135.341,54.3 133.316,54.3 133.316,54.788 133.316,57.4 135.841,57.4 136.341,57.9
  pour cut-out: 23.025,60.531 21.193,60.531 21.193,53.431 22.883,53.431 23.983,54.531 25.87,54.531 25.892,54.509 25.892,57.391 23.993,57.391 23.025,58.359
  pour cut-out: 62.585,60.056 60.753,60.056 60.753,52.956 62.443,52.956 63.543,54.056 65.43,54.056 65.452,54.034 65.452,56.916 63.553,56.916 62.585,57.884
  pour cut-out: 15.054,60.64 16.797,60.64 16.797,53.475 15.054,53.475 14.054,54.475 12.029,54.475 12.029,54.963 12.029,57.575 14.554,57.575 15.054,58.075
  pour cut-out: 54.614,60.165 56.357,60.165 56.357,53 54.614,53 53.614,54 51.589,54 51.589,54.488 51.589,57.1 54.114,57.1 54.614,57.6
  pour cut-out: 95.112,60.465 96.855,60.465 96.855,53.3 95.112,53.3 94.112,54.3 92.088,54.3 92.088,54.788 92.088,57.4 94.612,57.4 95.112,57.9
  pour cut-out: 103.083,60.356 101.251,60.356 101.251,53.256 102.941,53.256 104.041,54.356 105.928,54.356 105.95,54.334 105.95,57.216 104.051,57.216 103.083,58.184

## Silkscreen, mask and mechanical layers (free items; w line width, h text height)
Top Overlay:
  lines w0.254: 20.75,13 21.25,13.5 21.25,18 21.5,18.25 ; 103.267,14.786 124.5,14.786 ; 108.867,4.386 108.867,17.5 ; 116.367,4.136 116.367,17.5 ; 120.217,4.136 120.217,17.5
  text "GND" at 32.452,53.952 h0.6
  text "GND" at 112.302,53.952 h0.6
  text "GND" at 71.877,53.427 h0.6
  text "GND" at 151.527,50.127 h0.6
  text "ADC4" at 29.85,46.65 h2
  text "ADC2" at 110.025,46.475 h2
  text "ADC1" at 152.05,46.2 h2
  text "ADC3" at 69.875,46.1 h2
  text "GND" at 11.476,45.452 h0.6
  text "GND" at 25.276,45.452 h0.6
  text "GND" at 91.534,45.277 h0.6
  text "GND" at 105.334,45.277 h0.6
  text "GND" at 132.763,45.277 h0.6
  text "GND" at 146.563,45.277 h0.6
  text "GND" at 51.043,44.97 h0.6
  text "GND" at 64.843,44.97 h0.6
  text "GND" at 33.503,28.703 h1
  text "GND" at 37.503,28.703 h1
  text "VIN: 7V - 65V / VCC+ = 5.1V / VREF  = 2.5V" at 104.4,20.225 h1.5
  text "VIN: 7V - 65V" at 128.654,16.654 h1.5
  text "12..24 VDC" at 15.453,11.453 h1
  text "CH# ADC#  P  N / CH1 ADC1  7   8 / CH2 ADC2  4   5   / CH3 ADC3  3   6   / CH4 ADC4  1   2" at 103.85,4.725 h1.5
Mechanical 1:
  lines w0.1: 0,0 0,100 160,100 160,0 0,0
  lines w0.254: 40.998,64.46 40.998,93 38.999,93 38.999,64.46 40.999,64.46 ; 80.998,64.46 80.998,93 78.999,93 78.999,64.46 80.999,64.46 ; 120.999,64.46 120.999,93 119.001,93 119.001,64.46 121.001,64.46

## Dimensions
-15,2 to 0,0 on Mechanical 2
160,0 to 175,2 on Mechanical 2
160,0 to 163.175,27.525 on Mechanical 2
163.175,43.625 to 160,0 on Mechanical 2
0,100 to 4.65,99.11 on Mechanical 2
155.35,99.11 to 160,100 on Mechanical 2
32.35,99.11 to 45.65,99.11 on Mechanical 2
73.35,99.11 to 86.65,99.11 on Mechanical 2
114.35,99.11 to 127.65,99.11 on Mechanical 2
160,0 to 160,100 on Mechanical 2
0,100 to 160,100 on Mechanical 2